# Altium PCB Charger.PcbDoc
Units mm, origin at the board's own origin, x right, y up, seen from the top; angles counter-clockwise.
Board outline 26.92 x 19.81 mm, 2 copper layers (Top Layer, Bottom Layer), stack 1.671 mm thick; 28 components, 17 nets, 73 pads, 81 vias.
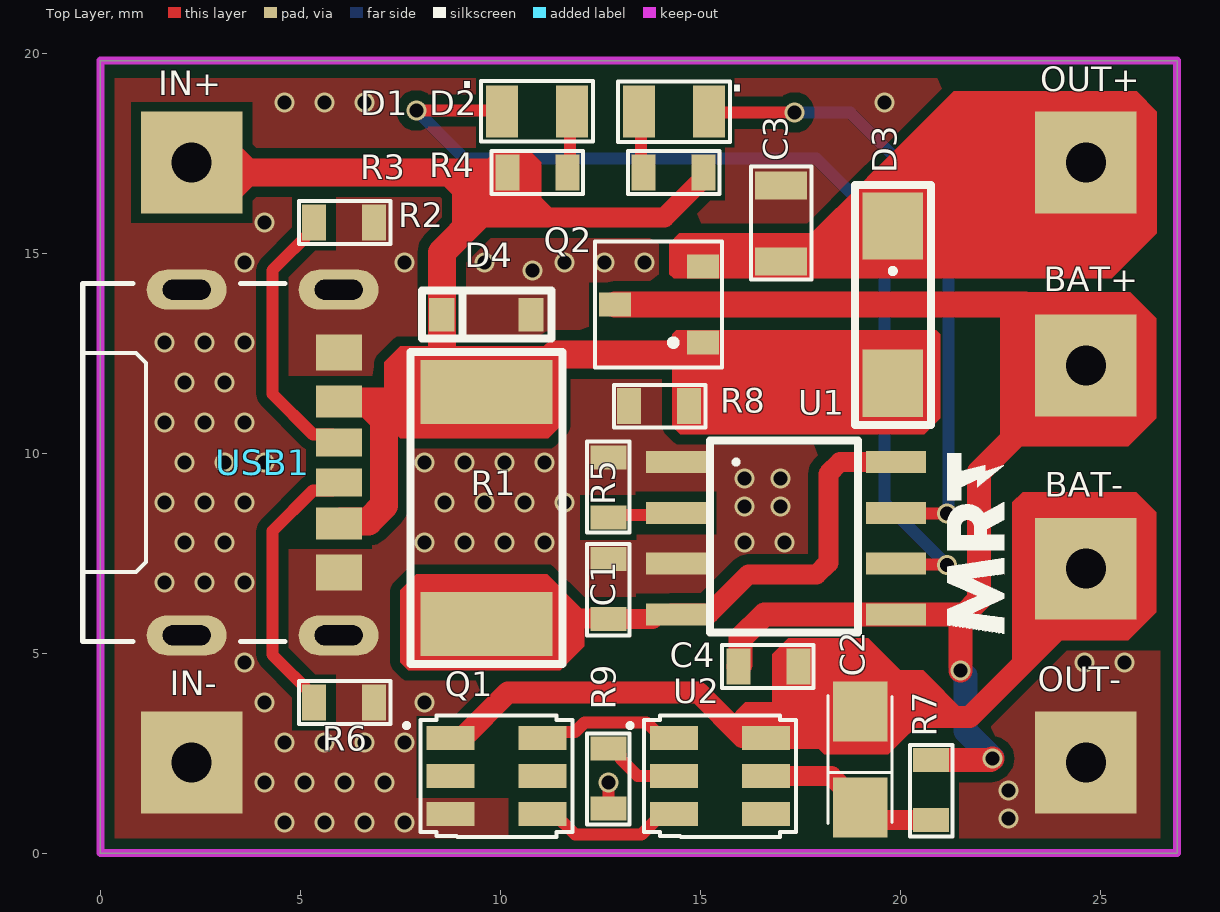
[diagram p0: Top Layer view]
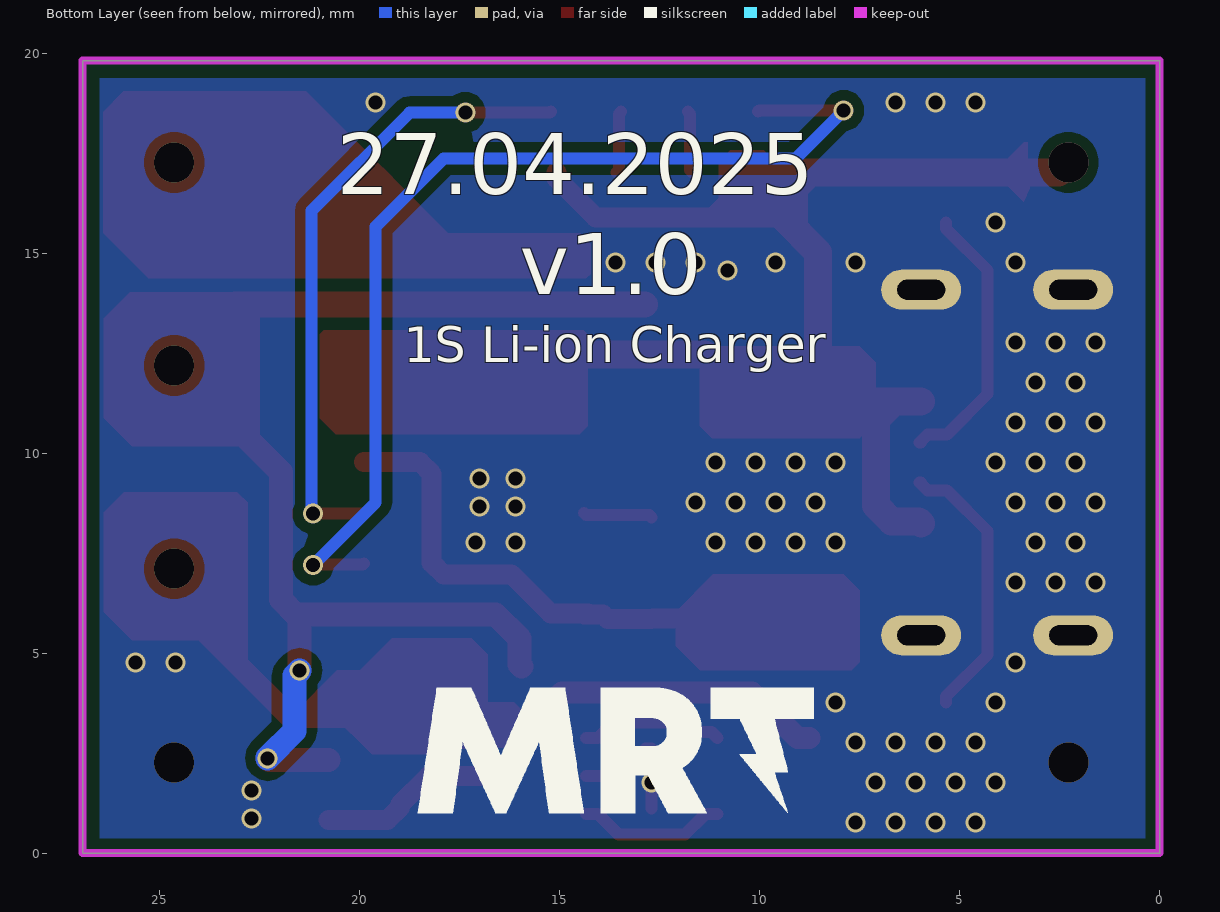
[diagram p1: Bottom Layer view, seen from below]
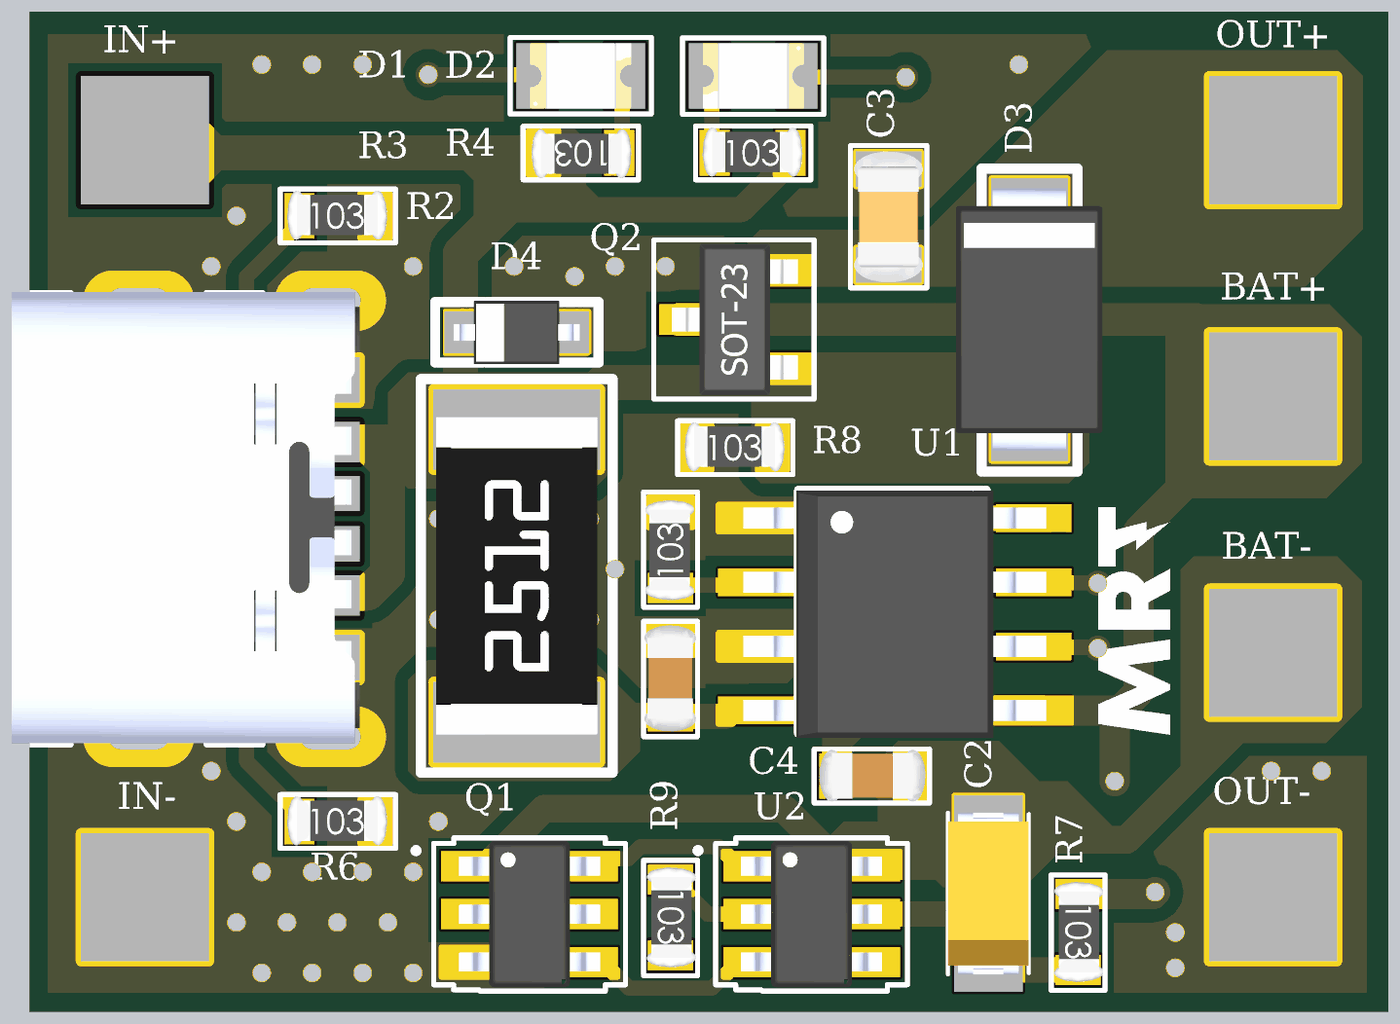
[diagram p2: 3D render of the assembled board from above, using the file's embedded part models]

## Layer stack, top to bottom
Top Solder: solder mask 0.0102, Solder Resist, Dk 3.5
Top Layer: signal copper 0.0356
Dielectric 1: dielectric 1.6, FR-4, Dk 4.5
Bottom Layer: signal copper 0.0356
Bottom Solder: solder mask 0.0102, Solder Resist, Dk 3.5

## Board outline
0,0 26.924,0 26.924,19.812 0,19.812

## Design rules (kind name [scope] priority, off if disabled: settings)
Clearance Clearance_1 [OnMid vs OnMid] p1: gap=0.254 ignorepadtopadclearanceinfootprint=FALSE except(0.15: SMDPad-SMDPad; 0.2: Arc-Arc Arc-Track Arc-SMDPad Track-Track Track-SMDPad) sourcerule=37 cellrowname=All cellrowtype=0 cellcolname=All cellcoltype=0 innerlayers=TRUE
Clearance Clearance_2 [(ExistsOnLayer('Top Layer') Or ExistsOnLayer('Bottom Layer')) vs (ExistsOnLayer('Top Layer') Or ExistsOnLayer('Bottom Layer'))] p2: gap=0.254 ignorepadtopadclearanceinfootprint=FALSE except(0.15: SMDPad-SMDPad; 0.2: Arc-Arc Arc-Track Arc-SMDPad Track-Track Track-SMDPad) sourcerule=37 cellrowname=All cellrowtype=0 cellcolname=All cellcoltype=0 outerlayers=TRUE
Clearance [All] p3: gap=0.254 ignorepadtopadclearanceinfootprint=FALSE except(0.15: SMDPad-SMDPad; 0.2: Arc-Arc Arc-Track Arc-SMDPad Track-Track Track-SMDPad) ismatrix=TRUE
ComponentClearance [All] p1: gap=0.254 collisioncheckmode=3 verticalgap=0.255 showdistances=FALSE
HoleSize [All] p1: absolutevalues=TRUE maxlimit=6.3 minlimit=0.2 maxpercent=80.000 minpercent=20.000
MinimumSolderMaskSliver [All] p1: minsoldermaskwidth=0
PlaneConnect [All] p1: planeconnectstyle=Direct reliefexpansion=0.508 reliefentries=4 reliefconductorwidth=0.254 reliefairgap=0.254
PolygonConnect [All] p1: connectstyle=Direct reliefconductorwidth=0.254 reliefentries=4 polygonreliefangle="90 Angle" airgapwidth=0.254
RoutingVias [All] p1: holewidth=0.711 width=1.27 viastyle="Through Hole" minholewidth=0.711 minwidth=1.27 maxholewidth=0.711 maxwidth=1.27
ShortCircuit [All] p1: allowed=TRUE
SilkToSilkClearance [All] p1: silktosilkclearance=0
SilkToSolderMaskClearance [IsPad] p1: minsilkscreentomaskgap=0 clearancetoexposedcopper=TRUE
SolderMaskExpansion [All] p1: expansion=0.102 istentingtop=FALSE
UnRoutedNet [All] p1: checkbadconnections=TRUE
Width MaxMinWidth_1 [All] p1: maxlimit=1 minlimit=0.254 preferedwidth=0.254 minimp=50.000000 maximp=50.000000 favimp=50.000000
Width [All] p2: maxlimit=0.254 minlimit=0.254 preferedwidth=0.254
22 further rules are at their usual default settings.

## Classes and differential pairs
component class TP4056:  C1 C2 C3 C4 D1 D2 D3 D4 Q1 Q2 R1 R2 R3 R4 R5 R6 R7 R8 R9 U1 U2

## Components (designator, comment, footprint, x,y, rotation, side; value= is the part's Value field where it differs from the comment)
BAT+ "BAT+" PAD#1 24.638,12.192 r0 top (schematic designator J2)
BAT- "BAT-" PAD#1 24.638,7.112 r0 top (schematic designator J5)
C1 "10u" "0603 CAP" 12.7,6.604 r270 top
C2 "1u" "3216 cap" 18.996,2.34 r90 top
C3 "1u" "0805 CAP" 17.018,15.748 r270 top
C4 "10u" "0603 CAP" 16.7,4.668 r180 top
D1 "BLUE" "LED 0805" 10.922,18.542 r0 top
D2 "RED" "LED 0805" 14.337,18.542 r180 top
D3 "SS34" SMA/DO-214AC 19.812,13.716 r270 top
D4 "PESD5V0S1BA" SOD-323 9.652,13.462 r0 top
IN+ "VIN" PAD#2 2.286,21.336 r0 top (schematic designator J1)
IN- "GND" PAD#3 2.286,2.286 r0 top (schematic designator J4)
OUT+ "OUT+" PAD#1 24.638,17.268 r0 top (schematic designator J3)
OUT- "OUT-" PAD#1 24.638,2.268 r0 top (schematic designator J6)
Q1 "FS8205A" SOT23-6 9.906,1.932 r270 top
Q2 "AO3401A" SOT23 13.97,13.716 r90 top
R1 "0.4R" "2512 RES" 9.652,8.636 r90 top
R2 "5k1" "0603 RES" 6.096,15.768 r0 top
R3 "1k2" "0603 RES" 10.934,17.018 r180 top
R4 "1k2" "0603 RES" 14.325,17.018 r0 top
R5 "1k2" "0603 RES" 12.7,9.144 r90 top
R6 "5k1" "0603 RES" 6.096,3.768 r0 top
R7 "100R" "0603 RES" 20.774,1.578 r270 top
R8 "100k" "0603 RES" 13.97,11.176 r0 top
R9 "1k" "0603 RES" 12.7,1.868 r270 top
U1 "TP4056" SOP-8 17.145,7.874 r0 top
U2 "DW01A" SOT23-6 15.494,1.932 r270 top
USB1 "Type C 6pin" "TYPE-C 6P(073)" 4.064,9.768 r270 top locked

## Footprints (in the part's own frame and the unit in brackets; to place one, negate y for a bottom-side part, rotate by r counter-clockwise, add the part's x,y. Pads: shape width x height; smd on the part's side, far side on the other; paste and mask are expansions set on the pad)
"0603 CAP" [mm]
  rect 0.6x0.9 smd paste-2539.97 mask+0.05: 1(-0.75,0) 2(0.75,0)
  silkscreen extent -1.13,-0.53 1.16,0.53, body extent -1.05,-0.52 1.05,0.51, height 0.8
"0603 RES" [mm]
  rect 0.6x0.9 smd paste-2539.97 mask+0.05: 1(-0.75,0) 2(0.75,0)
  silkscreen extent -1.13,-0.53 1.16,0.53, body extent -0.99,-0.47 0.99,0.51, height 0.43
"0805 CAP" [mm]
  rect 0.7x1.3 smd mask+0.05: 1(-0.95,0) 2(0.95,0)
  silkscreen extent -1.41,-0.75 1.41,0.76, body extent -1.3,-0.68 1.3,0.68, height 0.9
"2512 RES" [mm]
  rect 1.6x3.3 smd: 1(-2.9,0) 2(2.9,0)
  silkscreen extent -3.9,-1.9 3.9,1.9, body extent -3.15,-1.6 3.15,1.6, height 0.66
"3216 cap" [mm]
  rect 1.5x1.359 smd paste+0 mask+0.051: 1(-1.2,0) 2(1.2,0)
  silkscreen extent -1.6,-0.8 1.6,0.8, body extent -1.6,-0.8 1.6,0.8, height 1.8
"LED 0805" [mm]
  rect 0.8x1.3 smd mask+0.05: 1(-0.875,0) 2(0.875,0)
  silkscreen extent -1.4,-0.75 1.4,0.76, body extent -1,-0.65 1,0.65, height 0.8
PAD#1 [mm]
  rect 2.54x2.54 smd: 1(0,0)
PAD#2 [mm]
  rect 2.54x2.54 smd: 1(0,-4.068)
PAD#3 [mm]
  rect 2.54x2.54 smd: 1(0,-0.018)
SMA/DO-214AC [mm] "SMA/DO-214AC"
  rect 1.68x1.52 smd mask+0.051: 1(-1.965,0) 2(1.965,0)
  silkscreen extent -2.99,-0.95 3.01,0.95, body extent -2.6,-1.45 2.6,1.45, height 2.3
SOD-323 [mm]
  rect 0.63x0.83 smd mask+0.051: 1(-1.115,0) 2(1.115,0)
  silkscreen extent -1.61,-0.6 1.62,0.6, body extent -1.25,-0.63 1.25,0.62, height 1.11
SOP-8 [mm]
  rect 1.5x0.55 smd paste-2539.97 mask+0.05: 1(-2.75,1.905) 2(-2.75,0.635) 3(-2.75,-0.635) 4(-2.75,-1.905) 5(2.75,-1.905) 6(2.75,-0.635) 7(2.75,0.635) 8(2.75,1.905)
  silkscreen extent -1.9,-2.35 1.8,2.45, body extent -3,-2.45 3,2.45, height 1.75
SOT23 [mm]
  rect 0.6x0.8 smd paste-2539.97 mask+0.05: 1(-0.95,-1.1) 2(0.95,-1.1) 3(0,1.1)
  silkscreen extent -1.58,-1.58 1.58,1.6, body extent -1.5,-1.25 1.5,1.25, height 1.1
SOT23-6 [mm] "SOT23-6"
  rect 0.6x1.2 smd paste-2539.97 mask+0.05: 1(-0.95,-1.15) 2(0,-1.15) 3(0.95,-1.15) 4(0.95,1.15) 5(0,1.15) 6(-0.95,1.15)
  silkscreen extent -1.51,-2.26 1.53,1.9, body extent -1.45,-1.4 1.45,1.4, height 1.45
"TYPE-C 6P(073)" [mm] "SHOU HAN / TYPE-C 6P(073)"
  oval 1x2 hole 0.5 slot 1.2 at 90 deg: 7(-4.32,-1.902) 7(-4.32,1.898) 7(4.32,-1.902) 7(4.32,1.898)
  rect 0.7x1.15 smd: A5(-0.5,1.903) B5(0.5,1.903)
  rect 0.8x1.15 smd: A9(1.52,1.903) B9(-1.52,1.903)
  rect 0.9x1.15 smd: A12(2.75,1.903) B12(-2.75,1.903)
  silkscreen extent -4.47,-4.5 4.47,0.55, body extent -4.5,-4.42 4.44,2.48, height 3.26

## Part data
BAT+ BAT- IN+ IN- OUT+ OUT-: library part PAD, "Solder pad"
C1 C4: library part "0603 100p CAP", "CL10A106MA8NRNC", Case=0603
C2: library part "3216 Tantal Cap SMD"
C3: library part "0805 10u CAP", Case=0805
D1: library part "LED GREEN 0805"
D2: library part "LED RED 0805"
D3: "40V Independent Type 3A 550mV@3A SMA(DO-214AC) Schottky Diodes ROHS"
D4: "11A 8V 5.6V Bidirectional 5V SOD-323  ESD and Surge Protection (TVS/ESD) ROHS"
Q1: "20V 6A 18mΩ@4.5V,6A 1.5W 1.2V@250uA 2 N-Channel SOT-23-6L MOSFETs ROHS"
Q2: "30V 4A 44mΩ@10V,4.3A 1.4W 1.3V@250uA 1 Piece P-Channel SOT-23 MOSFETs ROHS"
R1: library part "2512 RES", "25121WJ040KT4E"
R2 R6: library part "0603 0R RES", Case=0603
R3 R4 R5: library part "0603 1k RES", "0603WAF1201T5E", Case=0603
R7 R9: library part "0603 1k RES", Case=0603
R8: library part "0603 100R RES", Case=0603
U1: "1A Standalone Linear Li-lon Battery Charger with Thermal Regulation"
U2: "BATTERY PROTECTION IC IN A SOT23"
USB1: library part "USB TYPE-C 6P(073) (Right Angle)", "Manufacturer SHOU HAN / MFR.Part # TYPE-C 6P(073) / JLCPCB Part # C668623", Current Rating=5A, JLCPCB Part=C668623, Manufacturer="SHOU HAN", Voltage Rating=5V

## Via types
v1: diameter 0.5, hole 0.35, Top Layer to Bottom Layer, tented both sides, 75 vias
v2: diameter 1, hole 1, Top Layer to Bottom Layer, 6 vias

## Nets (pads, with @x,y where several pads share a name; then routed paths per layer and width w, separated by ;. In a path a pad name is that pad's centre, name@x,y a point inside that pad or via, vN(x,y) a via of type N, cw(c..) or ccw(c..) an arc to the next point about the centre after c; other vN are vias at no path point)
BAT+: BAT+.1 C4.2 Q2.3 R7.1 U1.5 | length 32
  Top Layer w0.6: C4.2 16,4.718 16,5.368 16.601,5.969 U1.5 21.601,5.969 ; R7.1 22.26,2.328 v1(22.3,2.368) ; v1(21.5,4.568) 21.5,5.868 21.601,5.969 ; 23.114,13.716 v2(24.638,12.192) 21.971,9.525 21.971,6.339 21.601,5.969
  Top Layer w0.65: Q2.3 23.114,13.716
  Bottom Layer w0.6: v1(21.5,4.568) 21.628,4.44 21.628,3.059 22.3,2.387 v1(22.3,2.368)
BAT-: BAT-.1 C2.2 C4.1 Q1.1 U2.6 | length 19.2
  Top Layer w0.55: Q1.1 9.056,2.882 10.195,4.021 14.947,4.021 16.061,2.907 16.619,2.907 U2.6 18.409,2.882 18.996,3.469 C2.2 19.132,3.404 21.736,3.404 24.03,5.698 24.03,6.504 v2(24.638,7.112)
CC1: R2.1 USB1.A5 | length 7
  Top Layer w0.3: R2.1 5.346,15.618 4.3,14.572 4.3,11.485 5.317,10.468 5.8,10.468 6,10.268 USB1.A5
CC2: R6.1 USB1.B5 | length 7
  Top Layer w0.3: R6.1 5.346,3.918 4.3,4.964 4.3,8.051 5.317,9.068 5.8,9.068 6,9.268 USB1.B5
CHRG: D2.1 U1.7 | length 15.9
  Top Layer w0.3: D2.1 15.238,18.516 v1(17.359,18.516) ; U1.7 19.905,8.499 21.157,8.499 v1(21.167,8.489)
  Bottom Layer w0.3: v1(17.359,18.516) 18.752,18.516 21.2,16.068 21.2,8.522 v1(21.167,8.489)
CS: R9.1 U2.2 | length 2
  Top Layer w0.3: R9.1 12.85,2.618 13,2.468 13,2.368 13.436,1.932 U2.2
DW_VCC: C2.1 R7.2 U2.5 | length 4.6
  Top Layer w0.5: U2.5 18.275,1.932 18.996,1.211 C2.1 19.308,0.828 R7.2
GND: C1.1 C3.1 D4.2 IN-.1 OUT-.1 Q1.3 R2.2 R5.2 R6.2 R8.1 R9.2 U1.1 U1.3 USB1.7 USB1.A12 USB1.B12 | length 0.7
  Top Layer w0.3: R9.2 v1(12.7,1.768)
  other v1: 4.6,0.768 5.6,0.768 6.6,0.768 7.6,0.768 22.7,0.868 22.7,1.568 4.1,1.768 5.1,1.768 6.1,1.768 7.1,1.768 4.6,2.768 5.6,2.768 6.6,2.768 7.6,2.768 4.1,3.768 8.1,3.768 3.6,4.768 24.6,4.768 25.6,4.768 1.6,6.768 2.6,6.768 3.6,6.768 2.1,7.768 3.1,7.768 8.1,7.768 9.1,7.768 10.1,7.768 11.1,7.768 16.1,7.768 17.1,7.768 16.1,8.668 17,8.668 1.6,8.768 2.6,8.768 3.6,8.768 8.6,8.768 9.6,8.768 10.6,8.768 11.6,8.768 16.1,9.368 17,9.368 2.1,9.768 3.1,9.768 4.1,9.768 8.1,9.768 9.1,9.768 10.1,9.768 11.1,9.768 1.6,10.768 2.6,10.768 3.6,10.768 2.1,11.768 3.1,11.768 1.6,12.768 2.6,12.768 3.6,12.768 10.8,14.568 3.6,14.768 7.6,14.768 9.6,14.768 11.6,14.768 12.6,14.768 13.6,14.768 4.1,15.768 4.6,18.768 5.6,18.768 6.6,18.768 19.6,18.768
  other v2: 2.286,2.268 24.638,2.268
NetD1_2: D1.2 R3.1 | length 1.6
  Top Layer w0.3: R3.1 11.741,17.075 11.741,18.486 D1.2
NetD2_2: D2.2 R4.1 | length 1.6
  Top Layer w0.3: D2.2 13.518,18.486 13.518,17.075 R4.1
OC: Q1.4 U2.3 | length 3.7
  Top Layer w0.3: Q1.4 11.356,0.982 11.87,0.468 13.53,0.468 14.044,0.982 U2.3
OD: Q1.6 U2.1 | length 3.6
  Top Layer w0.3: Q1.6 11.206,3.032 11.869,3.032 12.105,3.268 13.658,3.268 14.044,2.882 U2.1
Rprog: R5.1 U1.2 | length 1.7
  Top Layer w0.3: R5.1 12.758,8.452 14.338,8.452 U1.2
STBY: D1.1 U1.6 | length 25.5
  Top Layer w0.3: v1(7.9,18.568) 10.021,18.568 D1.1 ; U1.6 19.914,7.22 21.148,7.22 v1(21.167,7.201)
  Bottom Layer w0.3: v1(7.9,18.568) 9.1,17.368 17.9,17.368 19.6,15.668 19.6,8.768 v1(21.167,7.201)
VCC: C1.2 R1.1 U1.4 U1.8 | length 13.3
  Top Layer w0.5: R1.1 9.784,5.868 12.686,5.868 C1.2 13.805,5.854 13.92,5.969 U1.4 ; U1.4@14.28,5.994 15.226,5.994 16.2,6.968 17.907,6.968 18.2,7.261 18.2,9.486 18.493,9.779 U1.8
VIN: D3.2 D4.1 IN+.1 Q2.1 R1.2 R3.2 R4.2 R8.2 USB1.A9 USB1.B9 | length 34
  Top Layer w0.5: 9.41,15.894 14.101,15.894 15.075,16.868 R4.2 ; R3.2@10.184,16.868 R3.2
  Top Layer w0.7: v2(2.286,17.268) 2.536,17.018 R3.2 ; USB1.A9 6.017,8.298 6.699,8.298 7.092,8.69 7.092,10.846 6.769,11.168 ; USB1.B9 8.887,11.288 9.135,11.536 R1.2 ; R1.2@8.987,11.536 8.537,11.986 D4.1 8.537,15.021 9.41,15.894 10.184,16.668 R3.2@10.184,16.868 ; R1.2@9.504,11.536 10.502,11.536 10.952,11.986 10.952,12.058 11.362,12.468 Q2.1@14.772,12.468
VOUT: C3.2 D3.1 OUT+.1 Q2.2
  other v2: 24.638,17.268
pads on no net: Q1.2 Q1.5 U2.4

## Polygon pours and split planes (outlines as drawn)
GND on Top Layer "GND_L01_P001" (solid, remove dead copper, pour order 1): 0.3,0.368 26.5,0.368 26.5,19.368 0.3,19.368
GND on Bottom Layer "GND_L02_P000" (solid, remove dead copper, pour order 0): 0.3,0.368 26.5,0.368 26.5,19.368 0.3,19.368

## Keep-outs
Keep-Out Layer:
  the board outline again, w0.2

## Other copper
Top Layer:
  region net BAT-: 16.8,3.768 16.13,3.768 15.665,3.303 16.2,2.768 17.982,2.768 18.096,2.882
  region net BAT-: 20,2.768 20.434,3.202 20.434,3.404 19.796,3.404
  region net BAT-: 20,4.568 20.574,4.568 21.628,3.514 21.628,3.178 21.083,3.469 19.796,3.469
  pour cut-out: 5.138,11.942 4.656,11.942 4.656,11.711 4.903,11.464
  pour cut-out: 9.61,1.378 10.202,1.378 10.414,1.59 10.414,1.981
  pour cut-out: 5.138,7.594 4.6,7.594 4.712,7.706 4.712,7.881
  pour cut-out: 21.478,1.382 21.478,1.758 21.307,1.929 21.307,1.806
  pour cut-out: 25.7,5.065 26.721,5.065 26.5,5.286 26.5,5.568
  region net BAT-: 22.8,5.568 22.8,4.768 23.1,4.768 23.6,5.268 23.6,5.568
  region net VIN: 3.4,16.268 4,16.868 3.75,16.868 3.5,17.118 3.35,16.968 3.1,16.968
  region net VIN: 3.9,17.268 3.4,17.768 3.3,17.768 3.3,17.168 3.1,16.968
  region net VIN: 8.9,16.368 8.4,16.868 8.4,16.968 8.8,16.968 8.85,16.918 9.492,16.918
  region net VIN: 8.8,16.968 8.8,15.268 9.563,16.031 10.362,16.031 10.362,16.69 10.184,16.868
  region net VIN: 10.922,16.485 11.388,16.018 10.95,16.018 10.8,15.868 10.7,15.968 10.6,15.968
  region net VIN: 10.075,17.568 10.73,17.568 11.025,17.273 11.025,16.143 12.017,15.894 10.499,15.894 10.225,16.168 9.925,16.168
  region net VCC: 7.5,6.568 7.9,6.968 11.17,6.968 12.1,6.038 12.1,5.168 11.5,4.568 7.7,4.568 7.5,4.768
  region net VIN: 7.1,11.468 7.1,12.268 7.5,12.668 11.162,12.668 11.5,12.33 11.5,10.668 11.2,10.368 7.5,10.368 7.092,10.776 7.092,10.846
  region net VIN: 9.7,15.868 10.5,15.868 10.7,16.068 10.7,17.468 10.6,17.568 9.9,17.568 9.7,17.368 9.7,17.268 9.7,17.368 9.7,17.268
  region net BAT-: 25.7,5.324 26.4,6.024 26.4,8.524 25.9,9.024 23.056,9.024 22.8,8.768 22.8,5.568 23.044,5.324
  region net BAT+: 25.7,10.168 26.4,10.868 26.4,13.368 25.747,14.021 22.853,14.021 22.5,13.668 22.5,10.368 22.7,10.168
  region net BAT-: 16.8,4.968 17.2,5.368 19.2,5.368 20,4.568 20,2.768 19.7,2.468 18.1,2.468 16.8,3.768
  region net VOUT: 14.224,15.24 14.478,15.494 17.78,15.494 19.05,16.764 19.304,17.018 19.558,17.272 21.336,19.05 25.908,19.05 26.416,18.542 26.416,15.494 25.29,14.368 14.334,14.368 14.224,14.478
  region net VIN: 14.3,10.668 14.5,10.468 20.6,10.468 21,10.868 21,12.968 20.9,13.068 14.4,13.068 14.3,12.968

## Silkscreen, mask and mechanical layers (free items; w line width, h text height)
Top Overlay:
  drawing of 4 lines, arcs and shapes, not listed
Bottom Overlay:
  drawing of 4 lines, arcs and shapes, not listed
  text "27.04.2025" at 20.572,16.48 h1.52
  text "v1.0" at 16.001,13.97 h1.52
  text "1S Li-ion Charger" at 18.899,11.97 h1.52